# EAGLE board Driver Message Board (EAGLE 9.6.2)
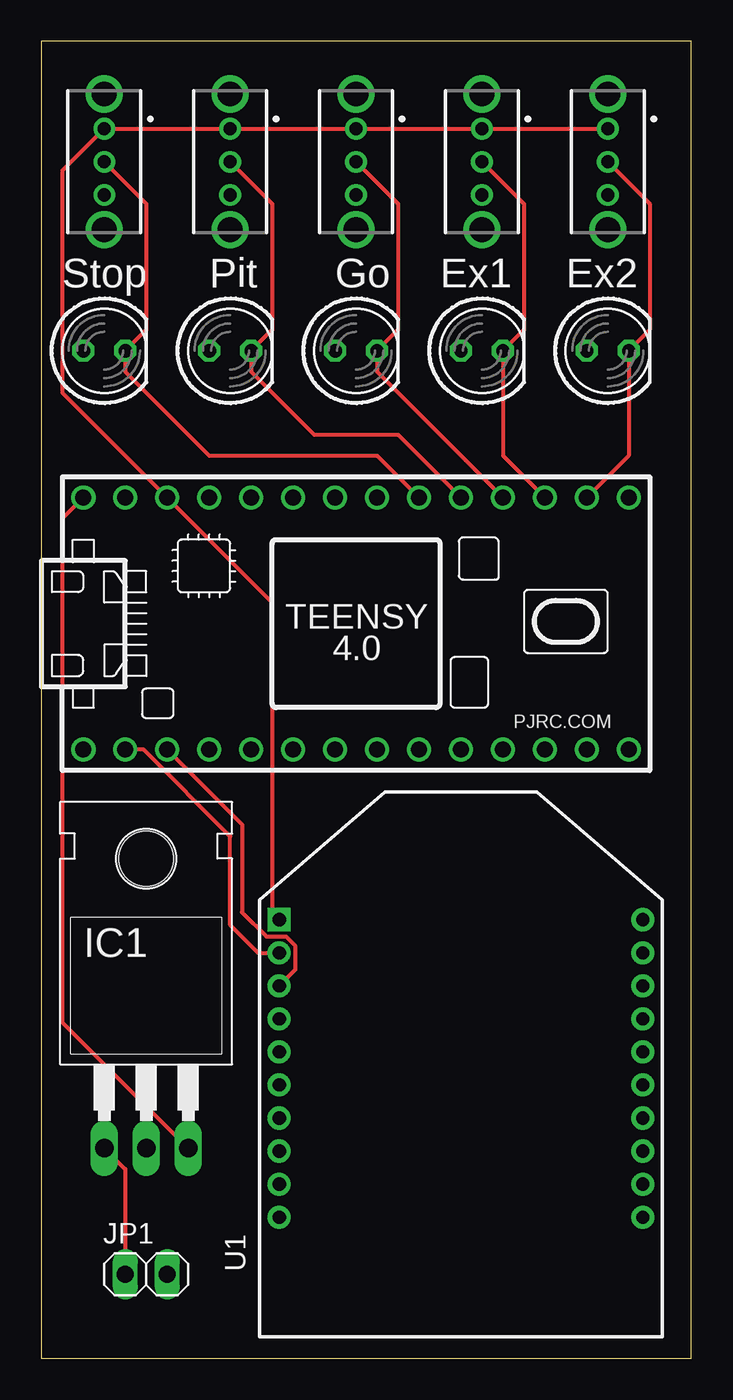
[diagram p0: board, top side]
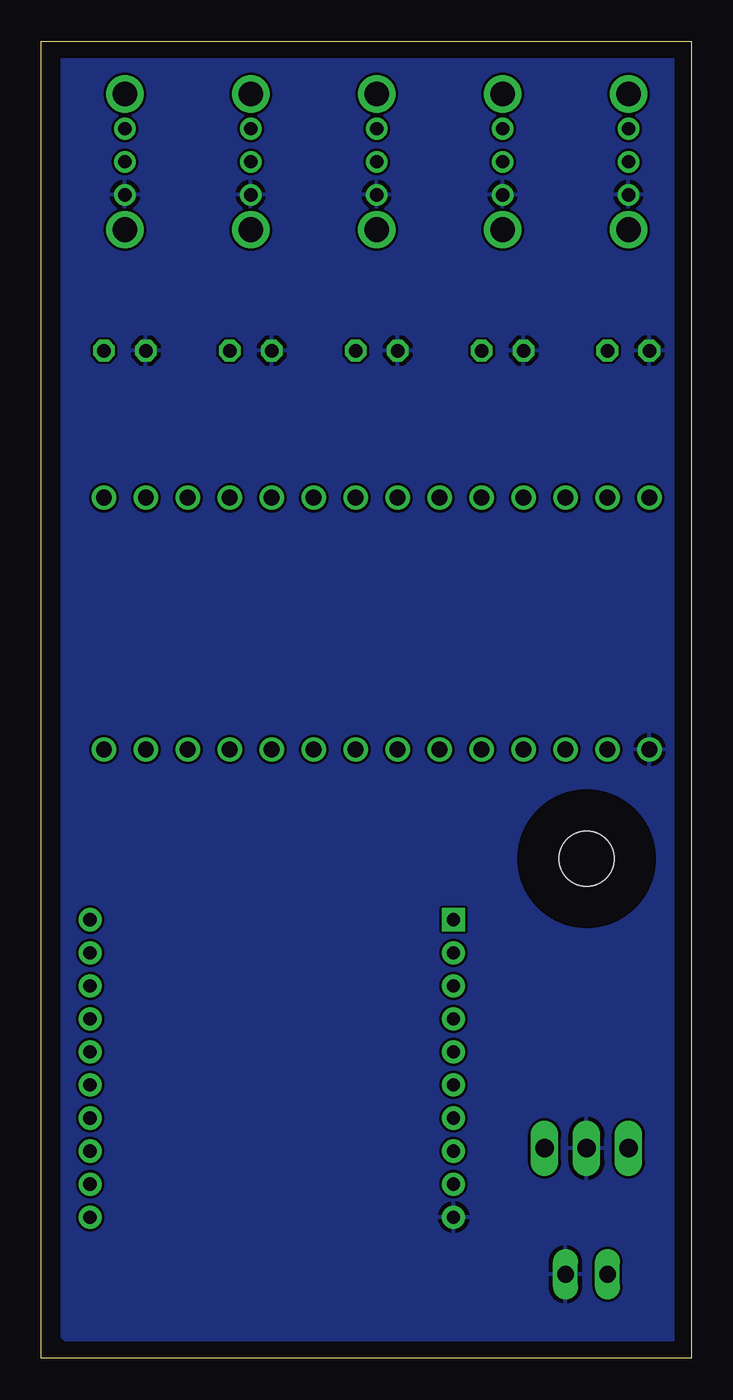
[diagram p1: board, bottom side, seen from below]

Size 39.35 x 79.68 mm. Coordinates in mm from the lower left corner, seen from the top.
Outline: 0,0 39.35,0 39.35,79.68 0,79.68 0,0
Copper layers (1*16): Top 0.035mm / dielectric 1.5mm / Bottom 0.035mm
Design rules "default": minimum track width 6mil, minimum drill 0.35mm, track to track 6mil, track to pad 6mil, pad to pad 6mil, via to via 6mil, smd to smd 6mil, copper to edge 40mil, drill to drill 6mil, minimum pad ring 10mil, minimum via ring 8mil, stop-mask expansion 4mil, vias tented up to drill 0mil, thermal gap 10mil

## Footprints (pad centres in the part's own frame; a part is rotated, then mirrored left to right if it is on the bottom)
TO-220-H-HOLE = drill 1.118 long: 1 -2.54,-6.35; 2 0,-6.35; 3 2.54,-6.35 | hole 3.302: 0,11.176
1X02 = drill 1.016 long: 1 -1.27,0; 2 1.27,0
LED-5MM = drill 0.813 octagon: A -1.27,0; K 1.27,0
OS102011MA1QN1 = drill 0.8 pad 1.3: 1 -2,0; 2 0,0; 3 2,0 | drill 1.5 pad 2.25: 4 -4.1,0; 5 4.1,0
XBEE_PRO_S3B = drill 0.8 pad 1.4 square: 1 -11,8.75 | drill 0.8 pad 1.4: 2 -11,6.75; 3 -11,4.75; 4 -11,2.75; 5 -11,0.75; 6 -11,-1.25; 7 -11,-3.25; 8 -11,-5.25; 9 -11,-7.25; 10 -11,-9.25; 11 11,-9.25; 12 11,-7.25; 13 11,-5.25; 14 11,-3.25; 15 11,-1.25; 16 11,0.75; 17 11,2.75; 18 11,4.75; 19 11,6.75; 20 11,8.75
TEENSY_4.0_SIMPLE = drill 0.965: 0/RX -13.97,-7.62; 1/TX -11.43,-7.62; 2 -8.89,-7.62; 3/CANTX -6.35,-7.62; 3V3_LO -11.43,7.62; 4/CANRX -3.81,-7.62; 5 -1.27,-7.62; 6 1.27,-7.62; 7 3.81,-7.62; 8 6.35,-7.62; 9/CS 8.89,-7.62; 10/CS 11.43,-7.62; 11/MOSI 13.97,-7.62; 12/MISO 16.51,-7.62; 13/SCK 16.51,7.62; 14/A0 13.97,7.62; 15/A1 11.43,7.62; 16/A2 8.89,7.62; 17/A3 6.35,7.62; 18/A4/SDA 3.81,7.62; 19/A5/SCL 1.27,7.62; 20/A6 -1.27,7.62; 21/A7 -3.81,7.62; 22/A8 -6.35,7.62; 23/A9 -8.89,7.62; GND -16.51,-7.62; GND2 -13.97,7.62; VIN -16.51,7.62

## Placement (x,y rotation side)
IC1  [TO-220-H-HOLE]  6.35,19.05 0 top
JP1  [1X02]  6.35,5.08 0 top
LED1  [LED-5MM]  34.29,60.96 0 top
LED2  [LED-5MM]  26.67,60.96 0 top
LED3  [LED-5MM]  19.05,60.96 0 top
LED4  [LED-5MM]  11.43,60.96 0 top
LED5  [LED-5MM]  3.81,60.96 0 top
S1  SWITCH_SLIDE_OS102011MS2QN1  [OS102011MA1QN1]  34.29,72.39 270 top
S2  SWITCH_SLIDE_OS102011MS2QN1  [OS102011MA1QN1]  26.67,72.39 270 top
S3  SWITCH_SLIDE_OS102011MS2QN1  [OS102011MA1QN1]  19.05,72.39 270 top
S4  SWITCH_SLIDE_OS102011MS2QN1  [OS102011MA1QN1]  11.43,72.39 270 top
S5  SWITCH_SLIDE_OS102011MS2QN1  [OS102011MA1QN1]  3.81,72.39 270 top
U1  XBEE_PRO_S3B  [XBEE_PRO_S3B]  25.4,17.78 0 top
U$1  TEENSY_4.0_SIMPLE  [TEENSY_4.0_SIMPLE]  19.05,44.45 0 top

## Library data of the parts
IC1 = GTOR - Active Components
JP1 = GTOR - Connectors
LED1-LED5 = GTOR - Passive Components
S1-S5 = GTOR - Active Components; ARROW_PART_NUMBER: OS102011MS2QN1; ARROW_PRICE-STOCK: https://www.arrow.com/en/products/os102011ms2qn1/ck; DESCRIPTION: Switch Slide Miniature SPDT 0.1A 12VDC Through Hole Slide Switch SPDT On-On 0.1 A@ 12 V dc Slide; HEIGHT: mm; MANUFACTURER_NAME: C & K COMPONENTS; MANUFACTURER_PART_NUMBER: OS102011MS2QN1; MOUSER_PART_NUMBER: 611-OS102011MS2QN1; MOUSER_PRICE-STOCK: https://www.mouser.co.uk/ProductDetail/CK/OS102011MS2QN1?qs=WtljUlYws5RvQ1hEv876nQ%3D%3D
U1 = GTOR - Microcontroller; DESCRIPTION: General ISM < 1GHz Transceiver Module 900MHz Antenna Not Included, RP-SMA Through Hole; DIGI-KEY_PART_NUMBER: 602-1293-ND; MF: Digi International; MP: XBP9B-XCST-001; PACKAGE: Module Digi International
U$1 = GTOR - Microcontroller

## Nets
3V_TEENSY: S1.1 S2.1 S3.1 S4.1 S5.1 U1.1 U$1.3V3_LO
+5V: IC1.3 U$1.VIN
A0: LED1.K S1.2 U$1.14/A0
A1: LED2.K S2.2 U$1.15/A1
A2: LED3.K S3.2 U$1.16/A2
A3: LED4.K S4.2 U$1.17/A3
A4: LED5.K S5.2 U$1.18/A4/SDA
GND: IC1.2 JP1.2 LED1.A LED2.A LED3.A LED4.A LED5.A S1.3 S2.3 S3.3 S4.3 S5.3 U1.10 U$1.GND
VCC: IC1.1 JP1.1
XBEE_RX: U1.3 U$1.1/TX
XBEE_TX: U1.2 U$1.0/RX

## Tracks (layer width: path | path; a pad name or v marks a point on that pad's centre or on a via)
3V_TEENSY
  Top 0.254: U1.1 13.97,26.96 13.97,45.72 U$1.3V3_LO 1.27,58.42 1.27,71.85 S5.1 S4.1 S3.1 S2.1 S1.1
+5V
  Top 0.254: U$1.VIN 1.27,50.8 1.27,20.32 IC1.3
A0
  Top 0.254: S1.2 36.83,69.85 36.83,62.23 LED1.K 35.56,54.61 U$1.14/A0
A1
  Top 0.254: S2.2 29.21,69.85 29.21,62.23 LED2.K 27.94,54.61 U$1.15/A1
A2
  Top 0.254: S3.2 21.59,69.85 21.59,62.23 LED3.K 20.32,59.69 U$1.16/A2
A3
  Top 0.254: S4.2 13.97,69.85 13.97,62.23 LED4.K 12.7,59.69 16.51,55.88 21.59,55.88 U$1.17/A3
A4
  Top 0.254: S5.2 6.35,69.85 6.35,62.23 LED5.K 5.08,59.69 10.16,54.61 20.32,54.61 U$1.18/A4/SDA
GND
  pour Bottom: 0,80.01 36.83,80.01 38.1,78.74 38.1,1.27 36.83,0 0,0
VCC
  Top 0.254: IC1.1 5.08,11.43 JP1.1
XBEE_RX
  Top 0.254: U$1.1/TX 12.15,32.3 12.15,26.98 13.62,25.51 14.81,25.51 15.38,24.94 15.38,23.51 U1.3
XBEE_TX
  Top 0.254: U$1.0/RX 6.18,36.83 11.43,31.58 11.43,26.23 13.13,24.53 U1.2

## Text on the board
tNames: Stop | Pit | Go | Ex1 | Ex2